# Altium PCB MainPCB.PcbDoc (part 1 of 2)
Units mil, origin at the board's own origin, x right, y up, seen from the top; angles counter-clockwise.
Board outline 4763.78 x 5931.1 mil, 2 copper layers (Top Layer, Bottom Layer); 67 components, 107 nets, 776 pads, 24 vias.
Unrouted connection lines stored in the file: 21.
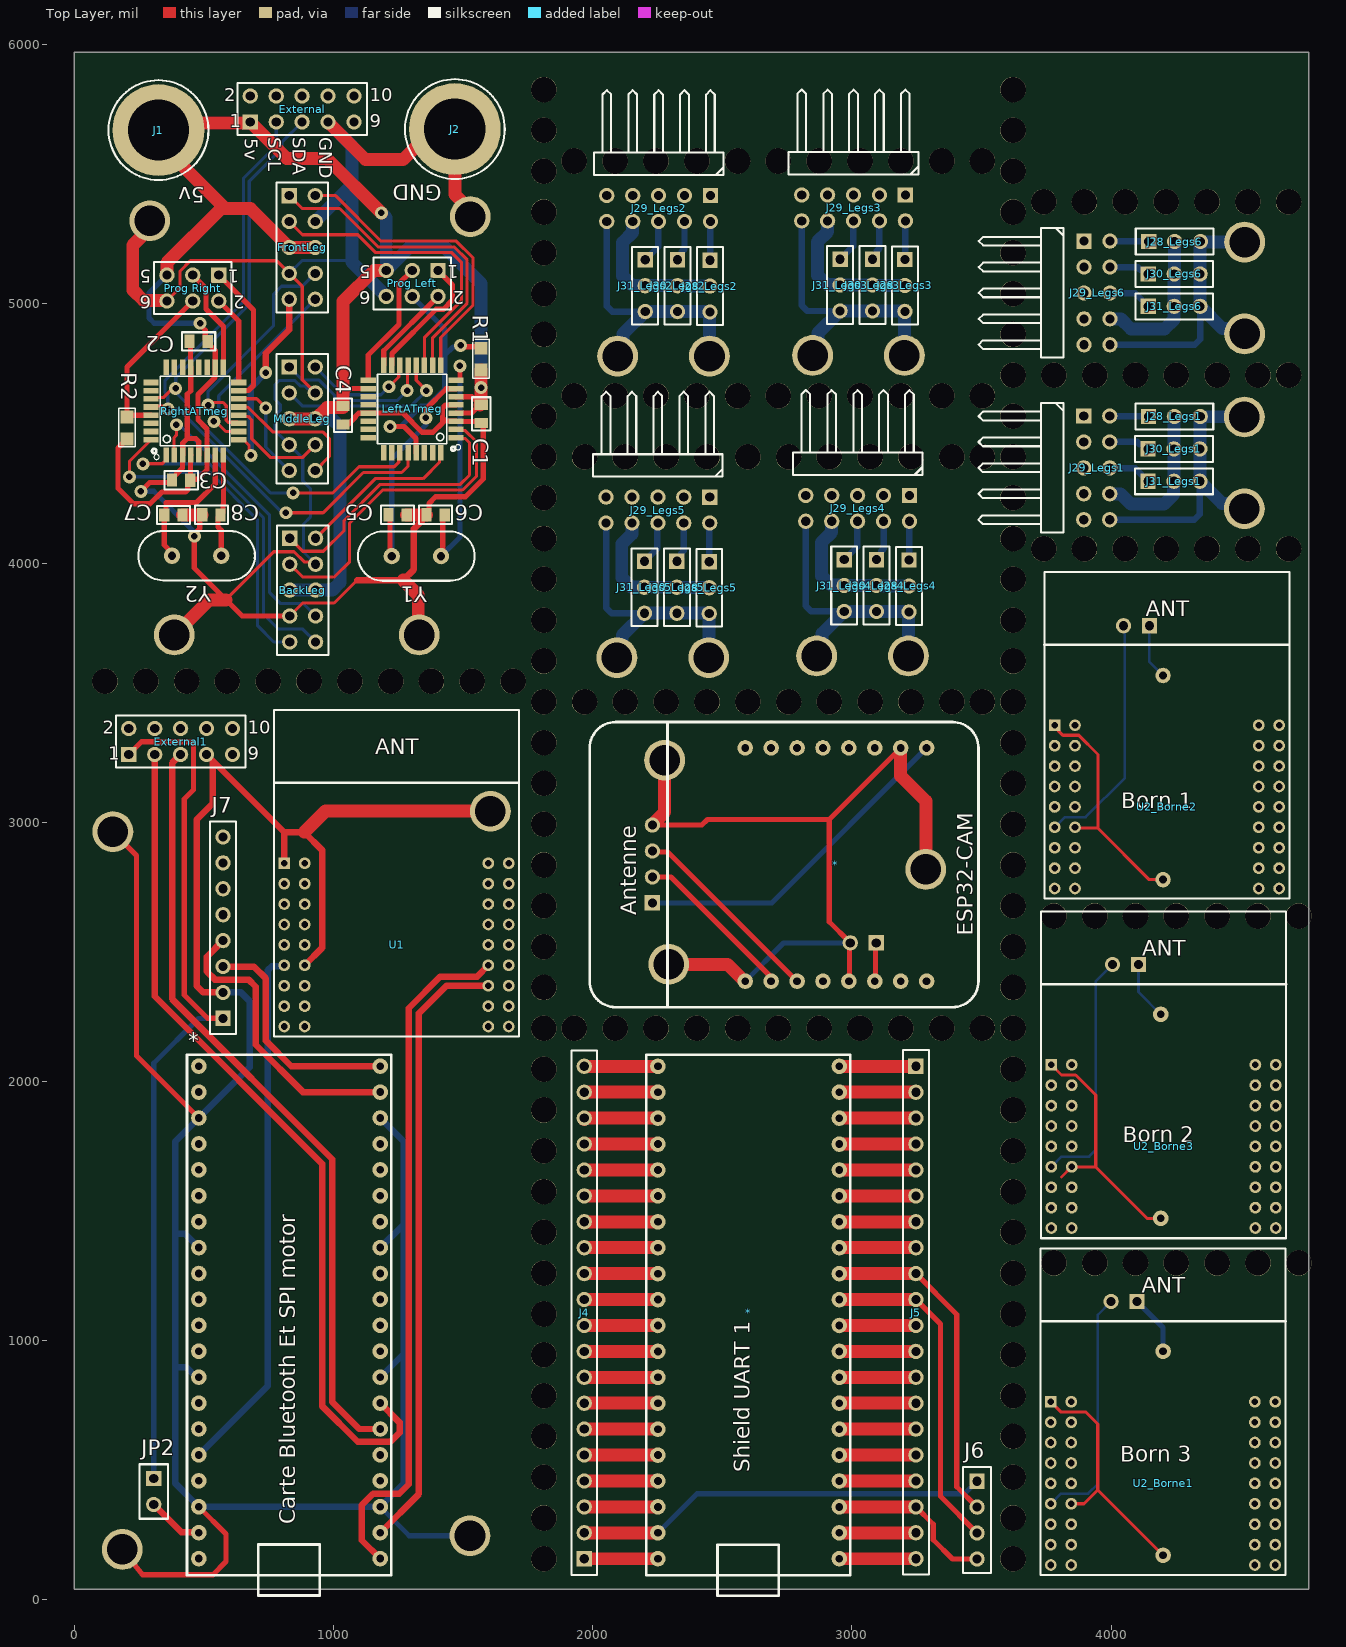
[diagram p0: Top Layer view]
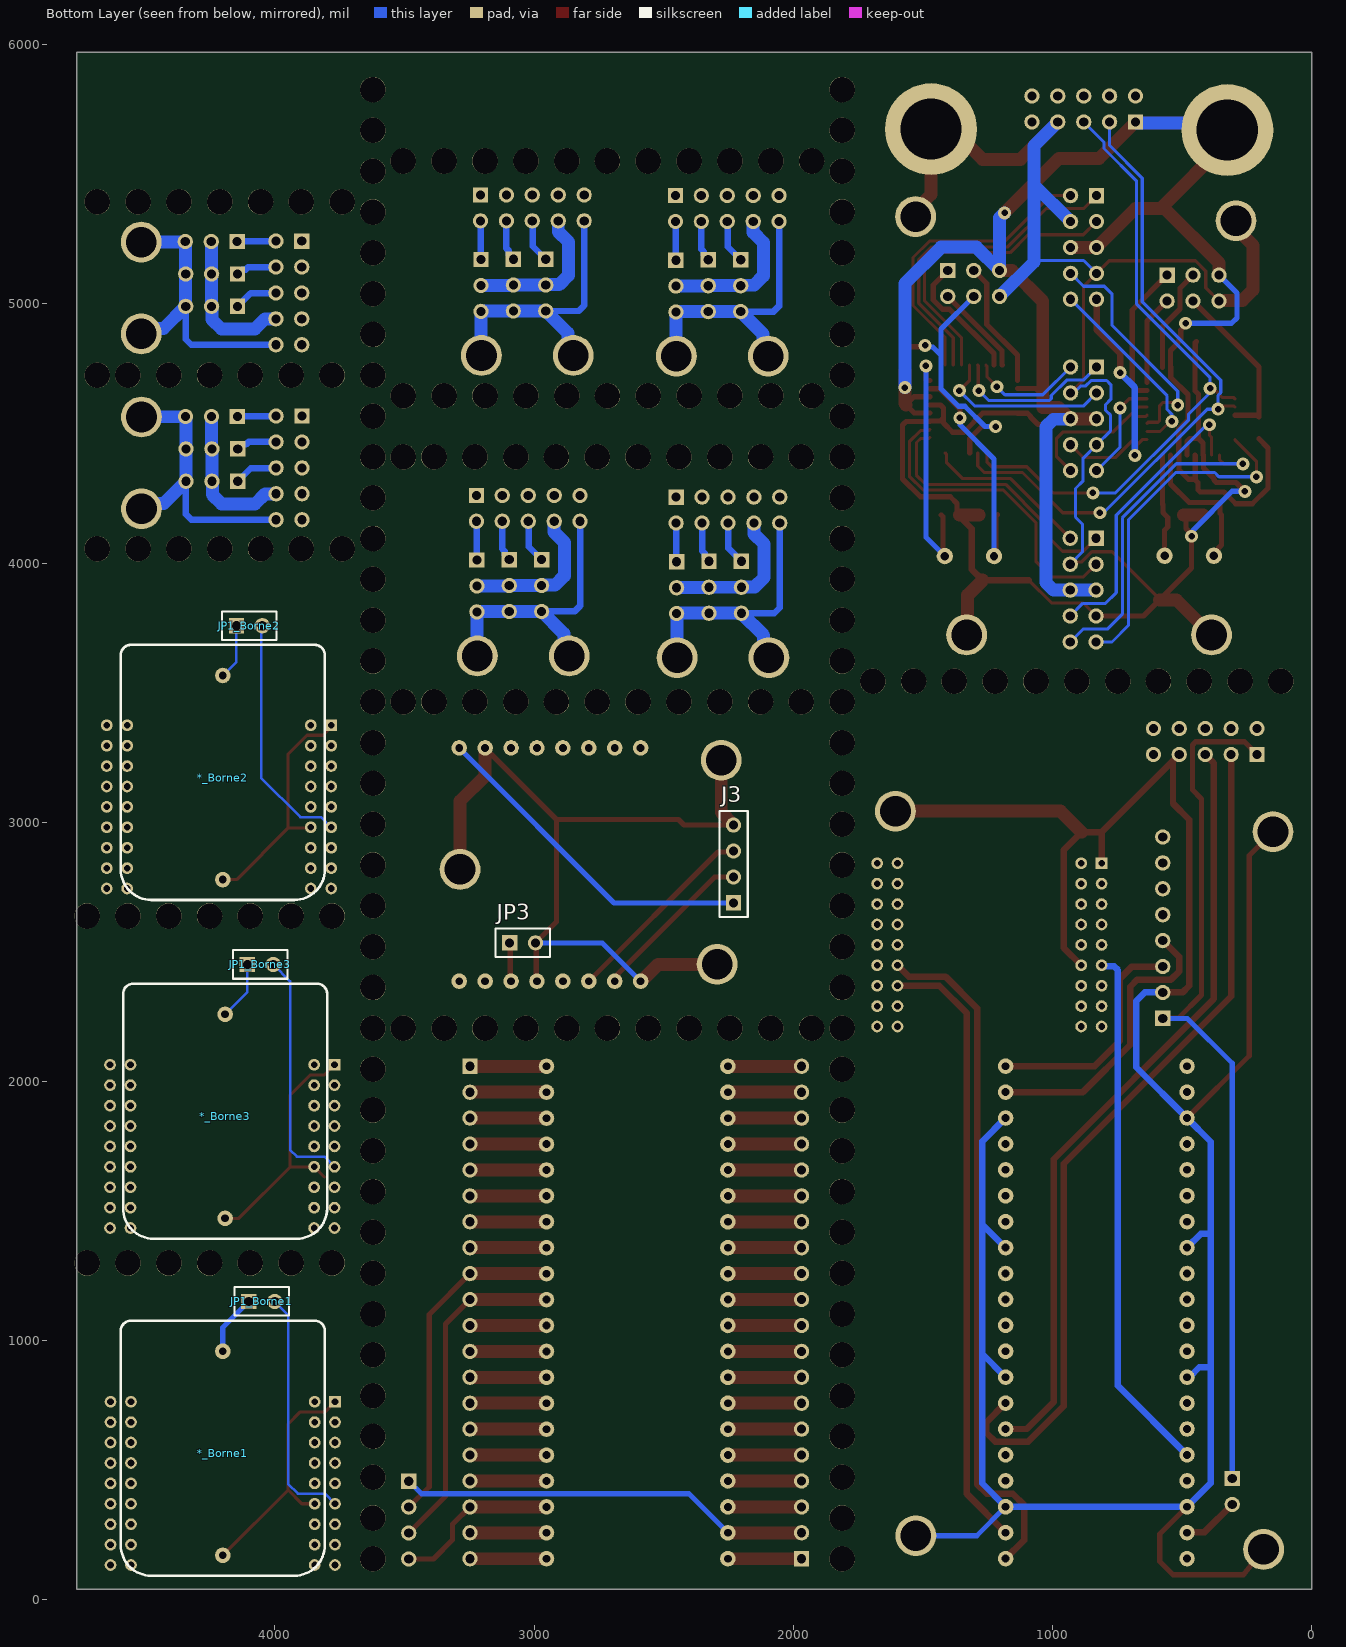
[diagram p1: Bottom Layer view, seen from below]
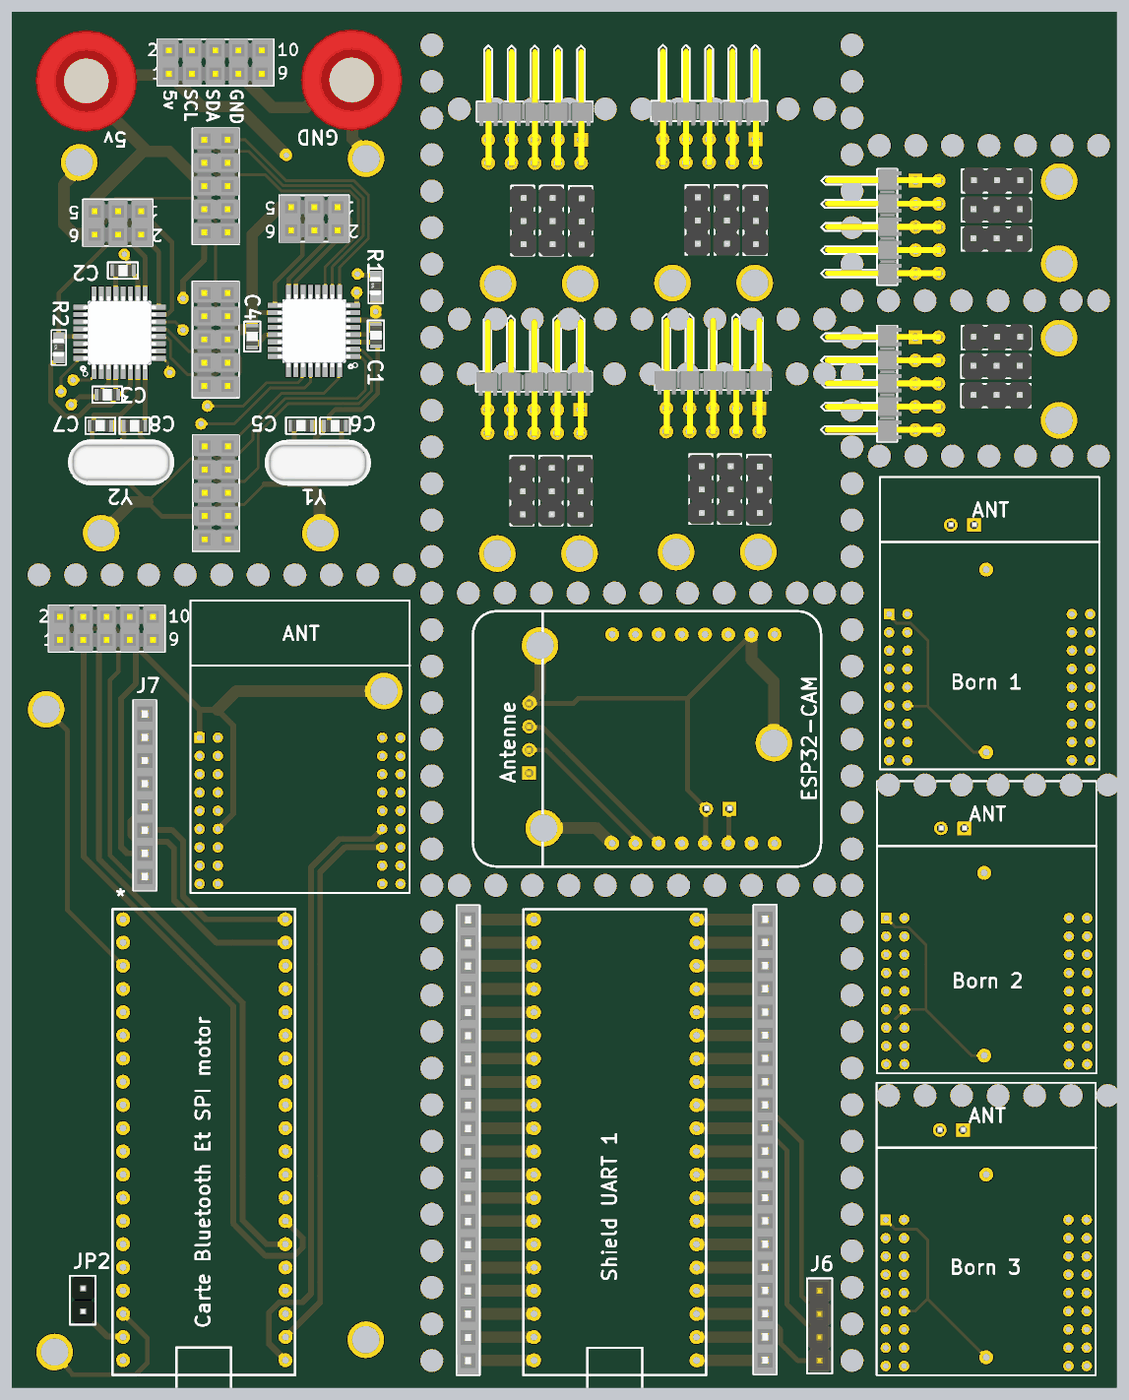
[diagram p3: 3D render of the assembled board from above, using the file's embedded part models]
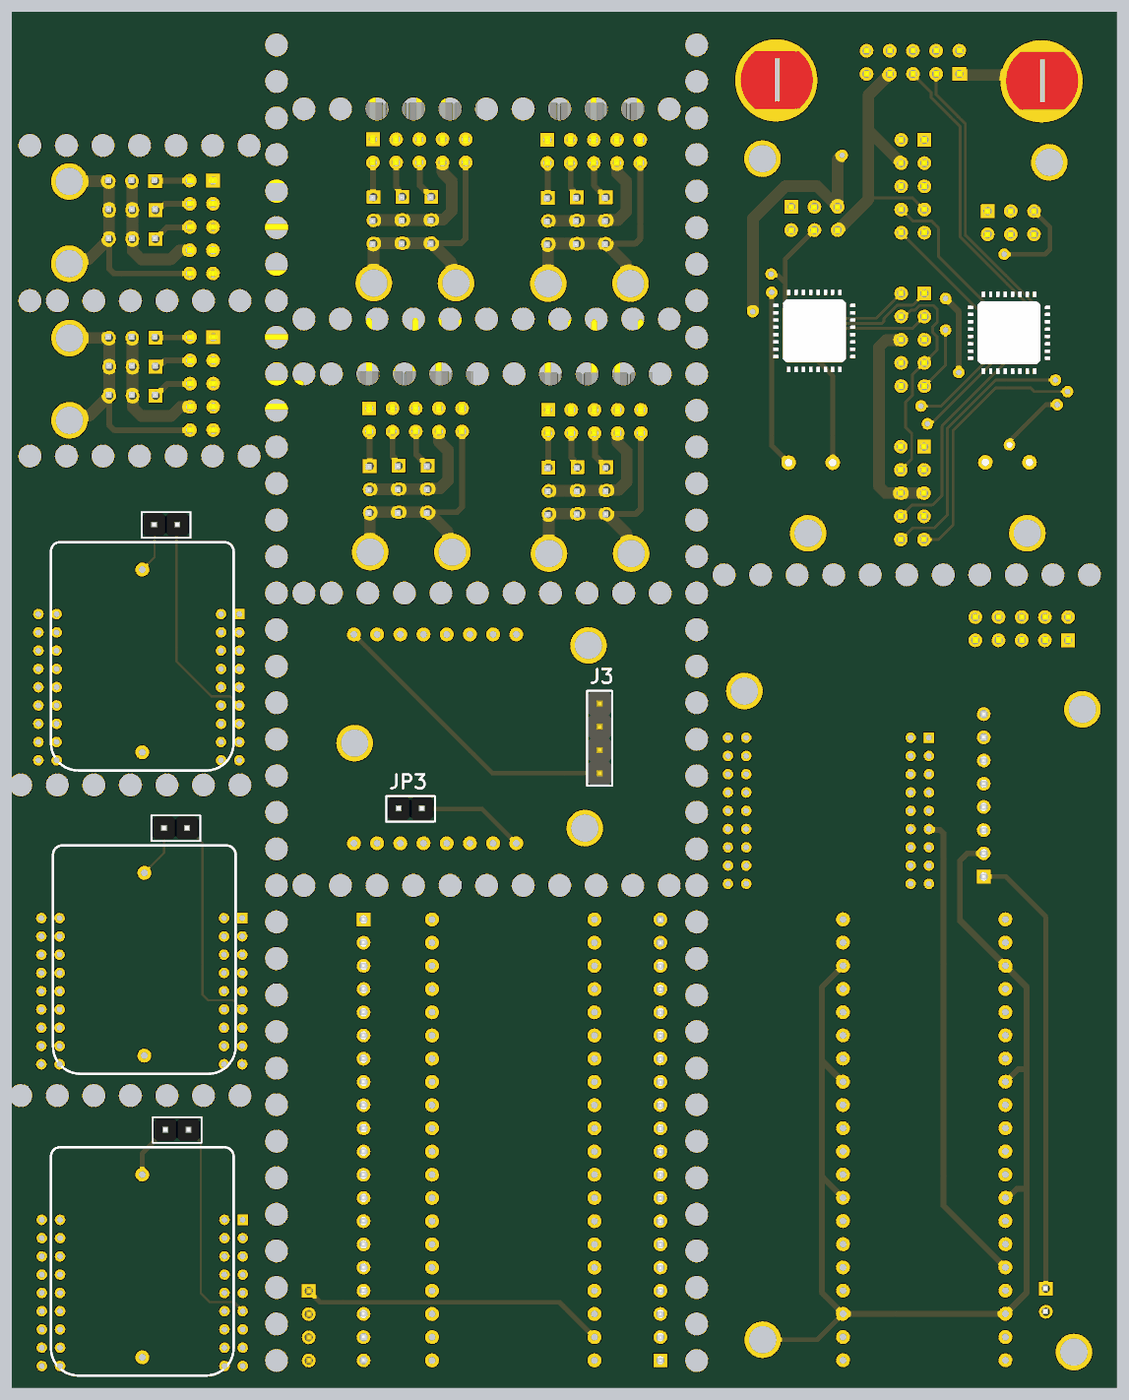
[diagram p4: 3D render of the assembled board from below, using the file's embedded part models]

## Layer stack, top to bottom
Top Solder: solder mask 0.4, Solder Resist, Dk 3.5
Top Layer: signal copper 1.4
Dielectric 1: dielectric 12.6, FR-4, Dk 4.8
Bottom Layer: signal copper 1.4
Bottom Solder: solder mask 0.4, Solder Resist, Dk 3.5

## Board outline
0,39.37 4763.78,39.37 4763.78,5970.47 0,5970.47

## Design rules (kind name [scope] priority, off if disabled: settings)
Clearance [All] p1: gap=4 ignorepadtopadclearanceinfootprint=FALSE
HoleSize [All] p1: absolutevalues=TRUE maxlimit=393.7 minlimit=1 maxpercent=80.000 minpercent=20.000
MinimumSolderMaskSliver [All] p1: minsoldermaskwidth=3.94
PlaneClearance [All] p1: clearance=40
PolygonConnect [All] p1: connectstyle=Relief reliefconductorwidth=10 reliefentries=4 polygonreliefangle="90 Angle" airgapwidth=10
RoutingVias [All] p1: holewidth=15 width=30 viastyle="Through Hole" minholewidth=15 minwidth=30 maxholewidth=25 maxwidth=50
SilkToSolderMaskClearance [IsPad] p1: minsilkscreentomaskgap=3.94 clearancetoexposedcopper=TRUE
SolderMaskExpansion [All] p1: expansion=4
Width [All] p1: maxlimit=50 minlimit=10 preferedwidth=10
26 further rules are at their usual default settings.

## Classes and differential pairs
component class ESPCAM: * J3 JP3
component class ShieldUART: * J4 J5 J6
component class Raspberry: * External1 J7 JP2 U1
component class Borne3: *_Borne3 JP1_Borne3 U2_Borne3
component class Borne2: *_Borne2 JP1_Borne2 U2_Borne2
component class Borne1: *_Borne1 JP1_Borne1 U2_Borne1
channel class Borne: Legs1 Legs2 Legs3
channel class Leg: Legs1 Legs2 Legs3 Legs4 Legs5 Legs6
component class Legs6: J28_Legs6 J29_Legs6 J30_Legs6 J31_Legs6
component class Legs5: J28_Legs5 J29_Legs5 J30_Legs5 J31_Legs5
component class Legs4: J28_Legs4 J29_Legs4 J30_Legs4 J31_Legs4
component class Legs3: J28_Legs3 J29_Legs3 J30_Legs3 J31_Legs3
component class Legs2: J28_Legs2 J29_Legs2 J30_Legs2 J31_Legs2
component class Legs1: J28_Legs1 J29_Legs1 J30_Legs1 J31_Legs1
component class Designator: BackLeg C1 C2 C3 C4 C5 C6 C7 C8 External FrontLeg J1 J2 MiddleLeg "Prog Left" "Prog Right" R1 R2 Y1 Y2

## Components (designator, comment, footprint, x,y, rotation, side; value= is the part's Value field where it differs from the comment)
* "ESP32-CAM" ESP32-CAM 3388.58,2286.42 r90 top
* "Raspberry Pico" "Raspberry Pico" 1851.77,-141.93 r0 top
* "Raspberry Pico" "Raspberry Pico" 80.31,-141.34 r0 top
*_Borne1 "BCR20H5" BCR20H5 4594.49,92.52 r180 bottom (schematic designator *)
*_Borne2 "BCR20H5" BCR20H5 4594.42,2699.8 r180 bottom (schematic designator *)
*_Borne3 "BCR20H5" BCR20H5 4585.63,1392.72 r180 bottom (schematic designator *)
BackLeg "BARRETTE_5 CONTACTS_2 RANGEES_MALE_DROITE" BARRETTE_5X2_M_D 831.1,4095.51 r270 top
C1 "CMS_0805_AVCC" CONDENSATEUR_CMS_0805 1570.05,4539.96 r90 top value=10µF
C2 "CMS_0805_VCC" CONDENSATEUR_CMS_0805 444.09,4855.31 r0 top value=10µF
C3 "CMS_0805_AVCC" CONDENSATEUR_CMS_0805 376.77,4319.91 r0 top value=10µF
C4 "CMS_0805_VCC" CONDENSATEUR_CMS_0805 1036.64,4534.84 r90 top value=10µF
C5 "CMS_0805" CONDENSATEUR_CMS_0805 1282.28,4185.63 r180 top value=22pF
C6 "CMS_0805" CONDENSATEUR_CMS_0805 1358.43,4186.02 r0 top value=22pF
C7 "CMS_0805" CONDENSATEUR_CMS_0805 417.72,4185.24 r180 top value=22pF
C8 "CMS_0805" CONDENSATEUR_CMS_0805 493.87,4186.02 r0 top value=22pF
External "BARRETTE_5 CONTACTS_2 RANGEES_MALE_DROITE" BARRETTE_5X2_M_D 678.94,5701.77 r0 top
External1 "BARRETTE_5 CONTACTS_2 RANGEES_MALE_DROITE" BARRETTE_5X2_M_D 210.04,3261.22 r0 top
FrontLeg "BARRETTE_5 CONTACTS_2 RANGEES_MALE_DROITE" BARRETTE_5X2_M_D 829.53,5417.48 r270 top
J1 "Alim 5v" DOUILLE_BANANE_4mm 324.71,5670.28 r180 top
J2 "Alim GND" DOUILLE_BANANE_4mm 1468.14,5674.21 r180 top
J3 "BARRETTE_4 CONTACTS_1 RANGEE_MALE_DROITE" BARRETTE_4_M_D 2230.31,2688.78 r90 bottom
J4 "BARRETTE_20 CONTACTS_1 RANGEE_FEMELLE_DROITE" BARRETTE_20_F_D 1967.52,158.07 r90 top
J5 "BARRETTE_20 CONTACTS_1 RANGEE_FEMELLE_DROITE" BARRETTE_20_F_D 3247.05,2058.07 r270 top
J6 "BARRETTE_4 CONTACTS_1 RANGEE_MALE_DROITE" BARRETTE_4_M_D 3483.27,457.28 r270 top
J7 "BARRETTE_8 CONTACTS_1 RANGEE_FEMELLE_DROITE" BARRETTE_8_F_D 573.82,2243.11 r90 top
J28_Legs1 "BARRETTE 3 CONTACTS 1 RANGEE MALE DROITE" BARRETTE_3_M_D 4144.49,4565.35 r0 top (schematic designator J28)
J28_Legs2 "BARRETTE 3 CONTACTS 1 RANGEE MALE DROITE" BARRETTE_3_M_D 2452.53,5168.5 r270 top (schematic designator J28)
J28_Legs3 "BARRETTE 3 CONTACTS 1 RANGEE MALE DROITE" BARRETTE_3_M_D 3204.67,5170.87 r270 top (schematic designator J28)
J28_Legs4 "BARRETTE 3 CONTACTS 1 RANGEE MALE DROITE" BARRETTE_3_M_D 3220.41,4011.42 r270 top (schematic designator J28)
J28_Legs5 "BARRETTE 3 CONTACTS 1 RANGEE MALE DROITE" BARRETTE_3_M_D 2449.74,4004.92 r270 top (schematic designator J28)
J28_Legs6 "BARRETTE 3 CONTACTS 1 RANGEE MALE DROITE" BARRETTE_3_M_D 4145.47,5240.32 r0 top (schematic designator J28)
J29_Legs1 "BARRETTE_5 CONTACTS_2 RANGEES_MALE_COUDEE" BARRETTE_5X2_M_C 3895.08,4567.16 r270 top (schematic designator J29)
J29_Legs2 "BARRETTE_5 CONTACTS_2 RANGEES_MALE_COUDEE" BARRETTE_5X2_M_C 2454.33,5417.91 r180 top (schematic designator J29)
J29_Legs3 "BARRETTE_5 CONTACTS_2 RANGEES_MALE_COUDEE" BARRETTE_5X2_M_C 3206.47,5420.28 r180 top (schematic designator J29)
J29_Legs4 "BARRETTE_5 CONTACTS_2 RANGEES_MALE_COUDEE" BARRETTE_5X2_M_C 3222.21,4260.83 r180 top (schematic designator J29)
J29_Legs5 "BARRETTE_5 CONTACTS_2 RANGEES_MALE_COUDEE" BARRETTE_5X2_M_C 2451.55,4254.33 r180 top (schematic designator J29)
J29_Legs6 "BARRETTE_5 CONTACTS_2 RANGEES_MALE_COUDEE" BARRETTE_5X2_M_C 3896.06,5242.13 r270 top (schematic designator J29)
J30_Legs1 "BARRETTE 3 CONTACTS 1 RANGEE MALE DROITE" BARRETTE_3_M_D 4142.91,4440.38 r0 top (schematic designator J30)
J30_Legs2 "BARRETTE 3 CONTACTS 1 RANGEE MALE DROITE" BARRETTE_3_M_D 2327.56,5170.08 r270 top (schematic designator J30)
J30_Legs3 "BARRETTE 3 CONTACTS 1 RANGEE MALE DROITE" BARRETTE_3_M_D 3079.7,5172.44 r270 top (schematic designator J30)
J30_Legs4 "BARRETTE 3 CONTACTS 1 RANGEE MALE DROITE" BARRETTE_3_M_D 3095.44,4012.99 r270 top (schematic designator J30)
J30_Legs5 "BARRETTE 3 CONTACTS 1 RANGEE MALE DROITE" BARRETTE_3_M_D 2324.77,4006.5 r270 top (schematic designator J30)
J30_Legs6 "BARRETTE 3 CONTACTS 1 RANGEE MALE DROITE" BARRETTE_3_M_D 4143.9,5115.35 r0 top (schematic designator J30)
J31_Legs1 "BARRETTE 3 CONTACTS 1 RANGEE MALE DROITE" BARRETTE_3_M_D 4142.91,4315.41 r0 top (schematic designator J31)
J31_Legs2 "BARRETTE 3 CONTACTS 1 RANGEE MALE DROITE" BARRETTE_3_M_D 2202.59,5170.08 r270 top (schematic designator J31)
J31_Legs3 "BARRETTE 3 CONTACTS 1 RANGEE MALE DROITE" BARRETTE_3_M_D 2954.72,5172.44 r270 top (schematic designator J31)
J31_Legs4 "BARRETTE 3 CONTACTS 1 RANGEE MALE DROITE" BARRETTE_3_M_D 2970.47,4012.99 r270 top (schematic designator J31)
J31_Legs5 "BARRETTE 3 CONTACTS 1 RANGEE MALE DROITE" BARRETTE_3_M_D 2199.8,4006.5 r270 top (schematic designator J31)
J31_Legs6 "BARRETTE 3 CONTACTS 1 RANGEE MALE DROITE" BARRETTE_3_M_D 4143.9,4990.38 r0 top (schematic designator J31)
JP1_Borne1 "JUMPER2" BARRETTE_2_M_D 4100.39,1150.84 r180 bottom (schematic designator JP1)
JP1_Borne2 "JUMPER2" BARRETTE_2_M_D 4148.23,3758.12 r180 bottom (schematic designator JP1)
JP1_Borne3 "JUMPER2" BARRETTE_2_M_D 4105.91,2451.03 r180 bottom (schematic designator JP1)
JP2 "JUMPER2" BARRETTE_2_M_D 306.1,467.52 r270 top
JP3 "JUMPER2" BARRETTE_2_M_D 3094.09,2534.45 r180 bottom
LeftATmeg "ATMEGA328P-AU" QFP80P900X900X120-32N 1303.54,4594.29 r180 top
MiddleLeg "BARRETTE_5 CONTACTS_2 RANGEES_MALE_DROITE" BARRETTE_5X2_M_D 829.53,4756.5 r270 top
"Prog Left" "BARRETTE_3 CONTACTS_2 RANGEES_MALE_DROITE" BARRETTE_3X2_M_D 1403.54,5128.94 r180 top
"Prog Right" "BARRETTE_3 CONTACTS_2 RANGEES_MALE_DROITE" BARRETTE_3X2_M_D 557.09,5110.83 r180 top
R1 "RESISTANCE_CMS_0805" RESISTANCE_CMS_0805 1569.29,4744.74 r90 top value=10K
R2 "RESISTANCE_CMS_0805" RESISTANCE_CMS_0805 202.93,4479.33 r90 top value=10K
RightATmeg "ATMEGA328P-AU" QFP80P900X900X120-32N 464.96,4586.42 r90 top
U1 "MOD51822" MOD51822 770.67,2172.24 r0 top
U2_Borne1 "MOD51822" MOD51822 3728.35,94.5 r0 top (schematic designator U2)
U2_Borne2 "MOD51822" MOD51822 3743.11,2704.72 r0 top (schematic designator U2)
U2_Borne3 "MOD51822" MOD51822 3730.32,1394.68 r0 top (schematic designator U2)
Y1 "QUARTZ_DROIT_BAS_PROFIL" QUARTZ_DROIT_BP 1224.8,4026.57 r0 top value=16MHz
Y2 "QUARTZ_DROIT_BAS_PROFIL" QUARTZ_DROIT_BP 376.77,4028.15 r0 top value=16MHz

## Footprints (in the part's own frame and the unit in brackets; to place one, negate y for a bottom-side part, rotate by r counter-clockwise, add the part's x,y. Pads: shape width x height; smd on the part's side, far side on the other; paste and mask are expansions set on the pad)
BARRETTE_2_M_D [mm] "BARRETTE 2 CONTACTS ; 1 RANGEE ; DROITE ; MALE ; ESPACEMENT BROCHES = 2.54 mm"
  rect 1.5x1.5 hole 0.9: 1(0,0)
  round 1.5 hole 0.9: 2(2.54,0)
  silkscreen extent -1.4,-1.4 3.94,1.4, body extent -1.3,-1.2 3.78,1.3, height 8.55
BARRETTE_3_M_D [mm] "BARRETTE 3 CONTACTS ; 1 RANGEE ; DROITE ; MALE ; ESPACEMENT BROCHES = 2.54 mm"
  rect 1.5x1.5 hole 0.9: 1(0,0)
  round 1.5 hole 0.9: 2(2.54,0) 3(5.08,0)
  silkscreen extent -1.27,-1.27 6.35,1.27, body extent -1.21,-1.42 6.41,1.5, height 8.61
BARRETTE_3X2_M_D [mm] "BARRETTE 3 CONTACTS ; 2 RANGEES ; DROITE ; MALE ; ESPACEMENT BROCHES = 2.54 mm"
  rect 1.5x1.5 hole 0.9: 1(0,0)
  round 1.5 hole 0.9: 2(0,2.54) 3(2.54,0) 4(2.54,2.54) 5(5.08,0) 6(5.08,2.54)
  silkscreen extent -1.27,-1.27 6.35,3.81, body extent -1.3,-1.24 6.32,3.84, height 10.67
BARRETTE_4_M_D [mm] "BARRETTE 4 CONTACTS ; 1 RANGEE ; DROIT ; MALE ; ESPACEMENT BROCHES = 2.54 mm"
  rect 1.5x1.5 hole 0.9: 1(0,0)
  round 1.5 hole 0.9: 2(2.54,0) 3(5.08,0) 4(7.62,0)
  silkscreen extent -1.38,-1.4 9.01,1.36, body extent -1.28,-1.3 8.88,1.24, height 10.1
BARRETTE_5X2_M_C [mm] "BARRETTE 5 CONTACTS ; 2 RANGEES ; COUDEE ; MALE ; ESPACEMENT BROCHES = 2.54 mm"
  rect 1.5x1.5 hole 0.9: 1(0,0)
  round 1.5 hole 0.9: 2(0,2.54) 3(2.54,0) 4(2.54,2.54) 5(5.08,0) 6(5.08,2.54) 7(7.62,0) 8(7.62,2.54) 9(10.16,0) 10(10.16,2.54)
  silkscreen extent -1.27,-10.34 11.43,-2, body extent -1.3,-9.9 11.4,2.86, height 5.64
BARRETTE_5X2_M_D [mm] "BARRETTE 5 CONTACTS ; 2 RANGEES ; DROITE ; MALE ; ESPACEMENT BROCHES = 2.54 mm"
  rect 1.5x1.5 hole 0.9: 1(0,0)
  round 1.5 hole 0.9: 2(0,2.54) 3(2.54,0) 4(2.54,2.54) 5(5.08,0) 6(5.08,2.54) 7(7.62,0) 8(7.62,2.54) 9(10.16,0) 10(10.16,2.54)
  silkscreen extent -1.27,-1.27 11.43,3.81, body extent -1.3,-1.24 11.4,3.84, height 10.67
BARRETTE_8_F_D [mm] "BARRETTE 8 CONTACTS ; 1 RANGEE ; DROITE ; FEMELLE ; ESPACEMENT BROCHES = 2.54 mm"
  rect 1.5x1.5 hole 0.9: 1(0,0)
  round 1.5 hole 0.9: 2(2.54,0) 3(5.08,0) 4(7.62,0) 5(10.16,0) 6(12.7,0) 7(15.24,0) 8(17.78,0)
  silkscreen extent -1.53,-1.27 19.3,1.27, body extent -1.53,-1.21 19.3,1.2, height 8.5
BARRETTE_20_F_D [mm] "BARRETTE 20 CONTACTS ; 1 RANGEE ; DROITE ; FEMELLE ; ESPACEMENT BROCHES = 2.54 mm"
  rect 1.5x1.5 hole 0.9: 1(0,0)
  round 1.5 hole 0.9: 2(2.54,0) 3(5.08,0) 4(7.62,0) 5(10.16,0) 6(12.7,0) 7(15.24,0) 8(17.78,0) 9(20.32,0) 10(22.86,0) 11(25.4,0) 12(27.94,0) 13(30.48,0) 14(33.02,0) 15(35.56,0) 16(38.1,0) 17(40.64,0) 18(43.18,0) 19(45.72,0) 20(48.26,0)
  silkscreen extent -1.6,-1.27 49.8,1.27, body extent -1.55,-1.2 49.75,1.21, height 8.5
BCR20H5 [mil]
  round 60 hole 30: 1(393.7,866.14) 2(393.7,78.74)
  silkscreen extent 0,0 787,984
CONDENSATEUR_CMS_0805 [mm] "CONDENSATEUR CMS 0805 ; DIMENSIONS : 2mm x 1.25mm"
  rect 1x1.3 smd: 1(0,0) 2(1.79,-0.01)
  silkscreen extent -0.74,-0.9 2.53,0.89, body extent -0.09,-0.67 1.91,0.64, height 0.73
DOUILLE_BANANE_4mm [mm] "DOUILLE BANANE ; DIAMETRE PASSAGE CONTACT = 4 mm ; DIAMETRE PERCAGE = 6 mm"
  round 9 hole 6: 1(0,0)
  Top Layer pour cut-out: -5.55,2.35 -4.2,4.3 -2.3,5.6 0,6 2.3,5.6 4.2,4.3 5.55,2.35 6,0 5.55,-2.35 4.3,-4.25 2.35,-5.55 0,-6 -2.35,-5.55 -4.2,-4.3 -5.55,-2.35 -6,0
  Bottom Layer pour cut-out: -5.55,2.35 -4.2,4.3 -2.3,5.6 0,6 2.3,5.6 4.2,4.3 5.55,2.35 6,0 5.55,-2.35 4.3,-4.25 2.35,-5.55 0,-6 -2.35,-5.55 -4.2,-4.3 -5.55,-2.35 -6,0
  silkscreen extent -4.89,-4.89 4.89,4.89, body extent -5.5,-5.6 5.63,5.53, height 4.79
ESP32-CAM [mil]
  round 60 hole 30: 1(100,100) 2(100,200) 3(100,300) 4(100,400) 5(100,500) 6(100,600) 7(100,700) 8(100,800) 9(1000,100) 10(1000,200) 11(1000,300) 12(1000,400) 13(1000,500) 14(1000,600) 15(1000,700) 16(1000,800)
  silkscreen extent 0,-100 1100,1400
MOD51822 [mm]
  rect 1.15x1.15 hole 0.65: 1(1,17)
  round 1.15 hole 0.65: 2(3,17) 3(1,15) 4(3,15) 5(1,13) 6(3,13) 7(1,11) 8(3,11) 9(1,9) 10(3,9) 11(1,7) 12(3,7) 13(1,5) 14(3,5) 15(1,3) 16(3,3) 17(1,1) 18(3,1) 19(21,1) 20(23,1) 21(21,3) 22(23,3) 23(21,5) 24(23,5) 25(21,7) 26(23,7) 27(21,9) 28(23,9) 29(21,11) 30(23,11) 31(21,13) 32(23,13) 33(21,15) 34(23,15) 35(21,17) 36(23,17)
  silkscreen extent 0,0 24,32
QFP80P900X900X120-32N [mm]
  rect 1.5x0.55 smd: 1(-4.3,2.8) 2(-4.3,2) 3(-4.3,1.2) 4(-4.3,0.4) 5(-4.3,-0.4) 6(-4.3,-1.2) 7(-4.3,-2) 8(-4.3,-2.8) 17(4.3,-2.8) 18(4.3,-2) 19(4.3,-1.2) 20(4.3,-0.4) 21(4.3,0.4) 22(4.3,1.2) 23(4.3,2) 24(4.3,2.8)
  rect 0.55x1.5 smd: 9(-2.8,-4.3) 10(-2,-4.3) 11(-1.2,-4.3) 12(-0.4,-4.3) 13(0.4,-4.3) 14(1.2,-4.3) 15(2,-4.3) 16(2.8,-4.3) 25(2.8,4.3) 26(2,4.3) 27(1.2,4.3) 28(0.4,4.3) 29(-0.4,4.3) 30(-1.2,4.3) 31(-2,4.3) 32(-2.8,4.3)
  silkscreen extent -4.75,-3.4 3.4,4, body extent -4.5,-4.5 4.5,4.5, height 0.53
QUARTZ_DROIT_BP [mil] "QUARTZ DROIT BAS PROFIL ; DIMENSIONS : 11.43mm x 4.82mm ; ESPACEMENT BROCHES : 4.82mm"
  round 63 hole 32: 1(0,0) 2(190,0)
  silkscreen extent -130,-95 320,95, body extent -129,-93 318,91, height 138
"Raspberry Pico" [mil]
  round 60 hole 30: 1(1100,300) 2(1100,400) 3(1100,500) 4(1100,600) 5(1100,700) 6(1100,800) 7(1100,900) 8(1100,1000) 9(1100,1100) 10(1100,1200) 11(1100,1300) 12(1100,1400) 13(1100,1500) 14(1100,1600) 15(1100,1700) 16(1100,1800) 17(1100,1900) 18(1100,2000) 19(1100,2100) 20(1100,2200) 21(400,2200) 22(400,2100) 23(400,2000) 24(400,1900) 25(400,1800) 26(400,1700) 27(400,1600) 28(400,1500) 29(400,1400) 30(400,1300) 31(400,1200) 32(400,1100) 33(400,1000) 34(400,900) 35(400,800) 36(400,700) 37(400,600) 38(400,500) 39(400,400) 40(400,300)
  silkscreen extent 354,157 1142,2244
RESISTANCE_CMS_0805 [mil] "RESISTANCE CMS 0805 ; DIMENSIONS : 2mm x 1.25mm"
  rect 50x50 smd: 1(0,0) 2(84,0)
  silkscreen extent -31,-31 118,31, body extent 4,-24 83,26, height 31

## Part data
BackLeg External External1 FrontLeg MiddleLeg: "BARRETTE 5 CONTACTS 2 RANGEES MALE DROITE", Type=M_D_5X2
C1 C2 C3 C4 C5 C6 C7 C8: library part CONDENSATEUR_CMS_CER_0805, "CONDENSATEUR CMS CERAMIQUE 0805", Type=CMS_0805
J1 J2: library part DOUILLE_BANANE_4mm, "DOUILLE BANANE 4 mm", Type=BANANE_4mm
J3 J6: "BARRETTE 4 CONTACTS 1 RANGEE MALE DROITE", Type=M_D_4
J28_Legs1 J28_Legs2 J28_Legs3 J28_Legs4 J28_Legs5 J28_Legs6 J30_Legs1 J30_Legs2 J30_Legs3 J30_Legs4 J30_Legs5 J30_Legs6 J31_Legs1 J31_Legs2 J31_Legs3 J31_Legs4 J31_Legs5 J31_Legs6: library part "BARRETTE_3 CONTACTS_1 RANGEE_MALE_DROITE", Type=M_D_3
J29_Legs1 J29_Legs2 J29_Legs3 J29_Legs4 J29_Legs5 J29_Legs6: "BARRETTE 5 CONTACTS 2 RANGEES MALE COUDEE", Type=M_C_5X2
JP1_Borne1 JP1_Borne2 JP1_Borne3 JP2 JP3: "BARRETTE 2 CONTACTS 1 RANGEE MALE DROITE", Type=JUMPER2
LeftATmeg RightATmeg: "AVR AVR® ATmega Microcontroller IC 8-Bit 20MHz 32KB (16K x 16) FLASH 32-TQFP (7x7)", Package="TQFP-32 Microchip", Availability="In Stock", Check_prices=https://www.snapeda.com/parts/ATMEGA328P-AU/Microchip/view-part/?ref=eda, MF="Microchip Technology", MP=ATMEGA328P-AU, Price=None, Purchase-URL=https://pricing.snapeda.com/search/part/ATMEGA328P-AU/?ref=eda, SnapEDA_Link=https://www.snapeda.com/parts/ATMEGA328P-AU/Microchip/view-part/?ref=snap
"Prog Left" "Prog Right": "BARRETTE 3 CONTACTS 2 RANGEES MALE DROITE", Type=M_D_3X2
R1 R2: "RESISTANCE CMS 0805", Type=CMS_0805
Y1 Y2: "QUARTZ DROIT BAS PROFIL", Type=DROIT_BP
J4 J5: Type=F_D_20
J7: Type=Gyro

## Free pads (board coordinates)
  round 157.48 hole 118.11: 2(148.62,2963.58) 2(185.04,193.9) 2(291.34,5320.87) 2(385.83,3722.44) 2(1330.71,3722.44) 2(1526.57,247.05) 2(1527.56,5336.61) 2(1605.31,3042.32) 2(2093.5,3634.84) 2(2096.29,4798.43) 2(2277.56,3239.17) 2(2293.31,2451.77) 2(2447.83,3634.84) 2(2450.62,4798.43) 2(2848.43,4800.79) 2(2864.17,3641.34) 2(3202.76,4800.79) 2(3218.5,3641.34) 2(3285.43,2817.91) 2(4514.57,4209.11) 2(4514.57,4563.44) 2(4515.55,4884.08) 2(4515.55,5238.42)
  round 98.43 hole 98.43: 6(118.11,3543.31) 6(275.59,3543.31) 6(433.07,3543.31) 6(590.55,3543.31) 6(748.03,3543.31) 6(905.51,3543.31) 6(1062.99,3543.31) 6(1220.47,3543.31) 6(1377.95,3543.31) 6(1535.43,3543.31) 6(1692.91,3543.31) 6(1811.02,157.48) 6(1811.02,314.96) 6(1811.02,472.44) 6(1811.02,629.92) 6(1811.02,787.4) 6(1811.02,944.88) 6(1811.02,1102.36) 6(1811.02,1259.84) 6(1811.02,1417.32) 6(1811.02,1574.8) 6(1811.02,1732.28) 6(1811.02,1889.76) 6(1811.02,2047.24) 6(1811.02,2204.72) 6(1811.02,2362.2) 6(1811.02,2519.68) 6(1811.02,2677.17) 6(1811.02,2834.65) 6(1811.02,2992.13) 6(1811.02,3149.61) 6(1811.02,3307.09) 6(1811.02,3464.57) 6(1811.02,3622.05) 6(1811.02,3779.53) 6(1811.02,3937.01) 6(1811.02,4094.49) 6(1811.02,4251.97) 6(1811.02,4409.45) 6(1811.02,4566.93) 6(1811.02,4724.41) 6(1811.02,4881.89) 6(1811.02,5039.37) 6(1811.02,5196.85) 6(1811.02,5354.33) 6(1811.02,5511.81) 6(1811.02,5669.29) 6(1811.02,5826.77) 6(1929.13,2204.72) 6(1929.13,4645.67) 6(1929.13,5551.18) 6(1968.5,4409.45) 6(1968.5,3464.57) 6(2086.61,2204.72) 6(2086.61,4645.67) 6(2086.61,5551.18) 6(2125.98,4409.45) 6(2125.98,3464.57) 6(2244.09,2204.72) 6(2244.09,4645.67) 6(2244.09,5551.18) 6(2283.46,4409.45) 6(2283.46,3464.57) 6(2401.57,2204.72) 6(2401.57,4645.67) 6(2401.57,5551.18) 6(2440.94,4409.45) 6(2440.95,3464.57) 6(2559.06,2204.72) 6(2559.06,4645.67) 6(2559.06,5551.18) 6(2598.43,4409.45) 6(2598.43,3464.57) 6(2716.54,2204.72) 6(2716.54,4645.67) 6(2716.54,5551.18) 6(2755.91,4409.45) 6(2755.91,3464.57) 6(2874.02,2204.72) 6(2874.02,4645.67) 6(2874.02,5551.18) 6(2913.39,4409.45) 6(2913.39,3464.57) 6(3031.5,2204.72) 6(3031.5,4645.67) 6(3031.5,5551.18) 6(3070.87,4409.45) 6(3070.87,3464.57) 6(3188.98,2204.72) 6(3188.98,4645.67) 6(3188.98,5551.18) 6(3228.35,4409.45) 6(3228.35,3464.57) 6(3346.46,2204.72) 6(3346.46,4645.67) 6(3346.46,5551.18) 6(3385.83,4409.45) 6(3385.83,3464.57) 6(3503.94,4409.45) 6(3503.94,2204.72) 6(3503.94,3464.57) 6(3503.94,4645.67) 6(3503.94,5551.18) 6(3622.05,157.48) 6(3622.05,314.96) 6(3622.05,472.44) 6(3622.05,629.92) 6(3622.05,787.4) 6(3622.05,944.88) 6(3622.05,1102.36) 6(3622.05,1259.84) 6(3622.05,1417.32) 6(3622.05,1574.8) 6(3622.05,1732.28) 6(3622.05,1889.76) 6(3622.05,2047.24) 6(3622.05,2204.72) 6(3622.05,2362.2) 6(3622.05,2519.68) 6(3622.05,2677.17) 6(3622.05,2834.65) 6(3622.05,2992.13) 6(3622.05,3149.61) 6(3622.05,3307.09) 6(3622.05,3464.57) 6(3622.05,3622.05) 6(3622.05,3779.53) 6(3622.05,3937.01) 6(3622.05,4094.49) 6(3622.05,4251.97) 6(3622.05,4409.45) 6(3622.05,4566.93) 6(3622.05,4724.41) 6(3622.05,4881.89) 6(3622.05,5039.37) 6(3622.05,5196.85) 6(3622.05,5354.33) 6(3622.05,5511.81) 6(3622.05,5669.29) 6(3622.05,5826.77) 6(3740.16,4055.12) 6(3740.16,5393.7) 6(3779.53,1299.21) 6(3779.53,2637.8) 6(3779.53,4724.41) 6(3897.64,4055.12) 6(3897.64,5393.7) 6(3937.01,1299.21) 6(3937.01,2637.8) 6(3937.01,4724.41) 6(4055.12,4055.12) 6(4055.12,5393.7) 6(4094.49,1299.21) 6(4094.49,2637.8) 6(4094.49,4724.41) 6(4212.6,4055.12) 6(4212.6,5393.7) 6(4251.97,1299.21) 6(4251.97,2637.8) 6(4251.97,4724.41) 6(4370.08,4055.12) 6(4370.08,5393.7) 6(4409.45,1299.21) 6(4409.45,2637.8) 6(4409.45,4724.41) 6(4527.56,4055.12) 6(4527.56,5393.7) 6(4566.93,1299.21) 6(4566.93,2637.8) 6(4566.93,4724.41) 6(4685.04,4055.12) 6(4685.04,4724.41) 6(4685.04,5393.7) 6(4724.41,1299.21) 6(4724.41,2637.8)

## Via types
v1: diameter 50, hole 25, Top Layer to Bottom Layer, 24 vias

## Nets (pads, with @x,y where several pads share a name; then routed paths per layer and width w, separated by ;. In a path a pad name is that pad's centre, name@x,y a point inside that pad or via, vN(x,y) a via of type N, cw(c..) or ccw(c..) an arc to the next point about the centre after c; other vN are vias at no path point)
+3.3: *.36@480.31,558.66 U1.11 | length 2051.8
  Bottom Layer w25: *.36@480.31,558.66 747.05,825.39 747.05,2429.31 761.69,2443.96 806.16,2443.96 U1.11@810.04,2447.83
+5: "Prog Left.5" "Prog Right.5" *.9@3288.58,3286.42 *.39@2251.77,258.07 BackLeg.5 BackLeg.6 C1.2 C2.2 C3.2 C4.2 External1.1 External.1 FrontLeg.5 FrontLeg.6 J1.1 J3.1 J4.2 J6.1 J7.1 J28_Legs1.2 J28_Legs2.2 J28_Legs3.2 J28_Legs4.2 J28_Legs5.2 J28_Legs6.2 J29_Legs1.8 J29_Legs2.8 J29_Legs3.8 J29_Legs4.8 J29_Legs5.8 J29_Legs6.8 J30_Legs1.2 J30_Legs2.2 J30_Legs3.2 J30_Legs4.2 J30_Legs5.2 J30_Legs6.2 J31_Legs1.2 J31_Legs2.2 J31_Legs3.2 J31_Legs4.2 J31_Legs5.2 J31_Legs6.2 JP2.1 LeftATmeg.4 LeftATmeg.6 LeftATmeg.18 MiddleLeg.5 MiddleLeg.6 R1.1 R2.1 RightATmeg.4 RightATmeg.6 RightATmeg.18 | length 17453.7
  Top Layer w10: C1.2@1570.44,4610.43 C1.2@1585.01,4625
  Top Layer w12: J1.1@324.71,5670.28 J1.1@324.71,5693.23 ; J28_Legs4.2@3220.41,3911.42 J28_Legs4.2@3226.32,3905.51
  Top Layer w20: R2.1@202.93,4479.33 167.94,4444.33 167.94,4381.52 167.94,4288.76 228.35,4228.35 292.02,4228.35 337.99,4274.32 429.49,4274.32 437.56,4282.39 437.56,4309.83 C3.2@447.24,4319.52 C3.2@448.54,4320.82 ; External1.1@210.04,3261.22 258.86,3310.04 447.83,3310.04 459.65,3298.23 459.65,3125 424.21,3089.57 424.21,2333.66 514.29,2243.58 573.35,2243.58 J7.1@573.82,2243.11 ; RightATmeg.4@449.21,4417.13 449.88,4416.46 448.54,4415.12 C3.2@448.54,4320.82 ; v1(485.63,4925.2) 485.63,4917.08 504.88,4897.83 504.88,4864.61 C2.2@514.57,4854.92 514.57,4849.02 543.7,4819.88 RightATmeg.18@543.7,4755.71 543.03,4755.04 543.03,4715.87 477.14,4649.98 477.14,4552.74 512.2,4517.68 RightATmeg.6@512.2,4417.13 511.54,4416.46 511.54,4359.76 475.2,4323.43 451.15,4323.43 C3.2@448.54,4320.82 ; 1037.04,4646.65 1063.42,4673.03 LeftATmeg.18@1134.25,4673.03 ; LeftATmeg.4@1472.83,4578.54 1532.65,4578.54 1564.54,4610.43 1533.43,4641.54 LeftATmeg.6@1472.83,4641.54
  Top Layer w50: 357.09,5110.83 357.09,5158.02 567.14,5368.07 ; MiddleLeg.5@829.53,4556.5 MiddleLeg.6@929.53,4556.5 931.98,4556.5 975.48,4600 1036.45,4600 1037.04,4600.59 C4.2@1037.04,4605.31 1037.04,4646.65 1037.04,5010.07 1155.91,5128.94 1203.54,5128.94 ; FrontLeg.6@929.53,5217.48 FrontLeg.5@829.53,5217.48 678.94,5368.07 582.22,5368.07 324.71,5625.59 J1.1@324.71,5670.28 351.67,5697.24 674.41,5697.24 External.1@678.94,5701.77 819.68,5561.02 974.8,5561.02 v1(1184.45,5351.38) ; C1.2@1564.54,4610.43 1569.29,4615.19 v1(1569.29,4677.17) R1.1@1569.29,4744.74 ; J4.2@1967.52,258.07 *.39@2251.77,258.07
  Bottom Layer w20: JP2.1@306.1,467.52 306.1,2069.88 479.33,2243.11 J7.1@573.82,2243.11 ; 357.09,5110.83 287.8,5041.54 287.8,4945.87 308.46,4925.2 v1(485.63,4925.2) ; J3.1@2230.31,2688.78 2690.94,2688.78 *.9@3288.58,3286.42 ; *.39@2251.77,258.07 2402.17,408.46 3434.45,408.46 J6.1@3483.27,457.28
  Bottom Layer w50: J1.1@324.71,5670.28 351.67,5697.24 674.41,5697.24 External.1@678.94,5701.77 ; BackLeg.5@831.1,3895.51 BackLeg.6@931.1,3895.51 995.71,3895.51 1025,3924.8 1025,4525.47 995.71,4554.76 931.26,4554.76 MiddleLeg.6@929.53,4556.5 ; v1(1184.45,5351.38) 1203.54,5332.28 1203.54,5128.94 1293.11,5218.5 1428.78,5218.5 1568.31,5078.98 1568.31,4678.15 v1(1569.29,4677.17) ; J29_Legs5.8@2151.55,4154.33 2151.55,4112.51 2112.18,4073.14 2112.18,3944.29 2148.24,3908.23 2198.07,3908.23 J31_Legs5.2@2199.8,3906.5 J30_Legs5.2@2324.77,3906.5 2325.56,3905.71 2448.96,3905.71 J28_Legs5.2@2449.74,3904.92 ; J29_Legs2.8@2154.33,5317.91 2154.33,5276.09 2114.96,5236.72 2114.96,5107.87 2151.02,5071.81 2200.86,5071.81 J31_Legs2.2@2202.59,5070.08 J30_Legs2.2@2327.56,5070.08 2328.35,5069.29 2451.74,5069.29 J28_Legs2.2@2452.53,5068.5 ; J29_Legs3.8@2906.47,5320.28 2906.47,5278.46 2867.1,5239.09 2867.1,5110.24 2903.16,5074.17 2952.99,5074.17 J31_Legs3.2@2954.72,5072.44 J30_Legs3.2@3079.7,5072.44 3080.48,5071.65 3203.88,5071.65 J28_Legs3.2@3204.67,5070.87 ; J29_Legs4.8@2922.21,4160.83 2922.21,4119.01 2882.84,4079.64 2882.84,3950.79 2918.91,3914.72 2968.74,3914.72 J31_Legs4.2@2970.47,3912.99 J30_Legs4.2@3095.44,3912.99 3096.23,3912.2 3219.63,3912.2 J28_Legs4.2@3220.41,3911.42 ; J29_Legs1.8@3995.08,4267.16 4036.9,4267.16 4076.27,4227.78 4205.12,4227.78 4241.18,4263.85 4241.18,4313.68 J31_Legs1.2@4242.91,4315.41 J30_Legs1.2@4242.91,4440.38 4243.7,4441.17 4243.7,4564.57 J28_Legs1.2@4244.49,4565.35 ; J29_Legs6.8@3996.06,4942.13 4037.88,4942.13 4077.25,4902.76 4206.1,4902.76 4242.17,4938.82 4242.17,4988.65 J31_Legs6.2@4243.9,4990.38 J30_Legs6.2@4243.9,5115.35 4244.69,5116.14 4244.69,5239.54 J28_Legs6.2@4245.47,5240.32